# Altium PCB PCB2.PcbDoc
Units mm, origin at the board's own origin, x right, y up, seen from the top; angles counter-clockwise.
Board outline 100 x 100 mm, 2 copper layers (Top Layer, Bottom Layer); 48 components, 48 nets, 148 pads, 14 vias.
Unrouted connection lines stored in the file: 30.
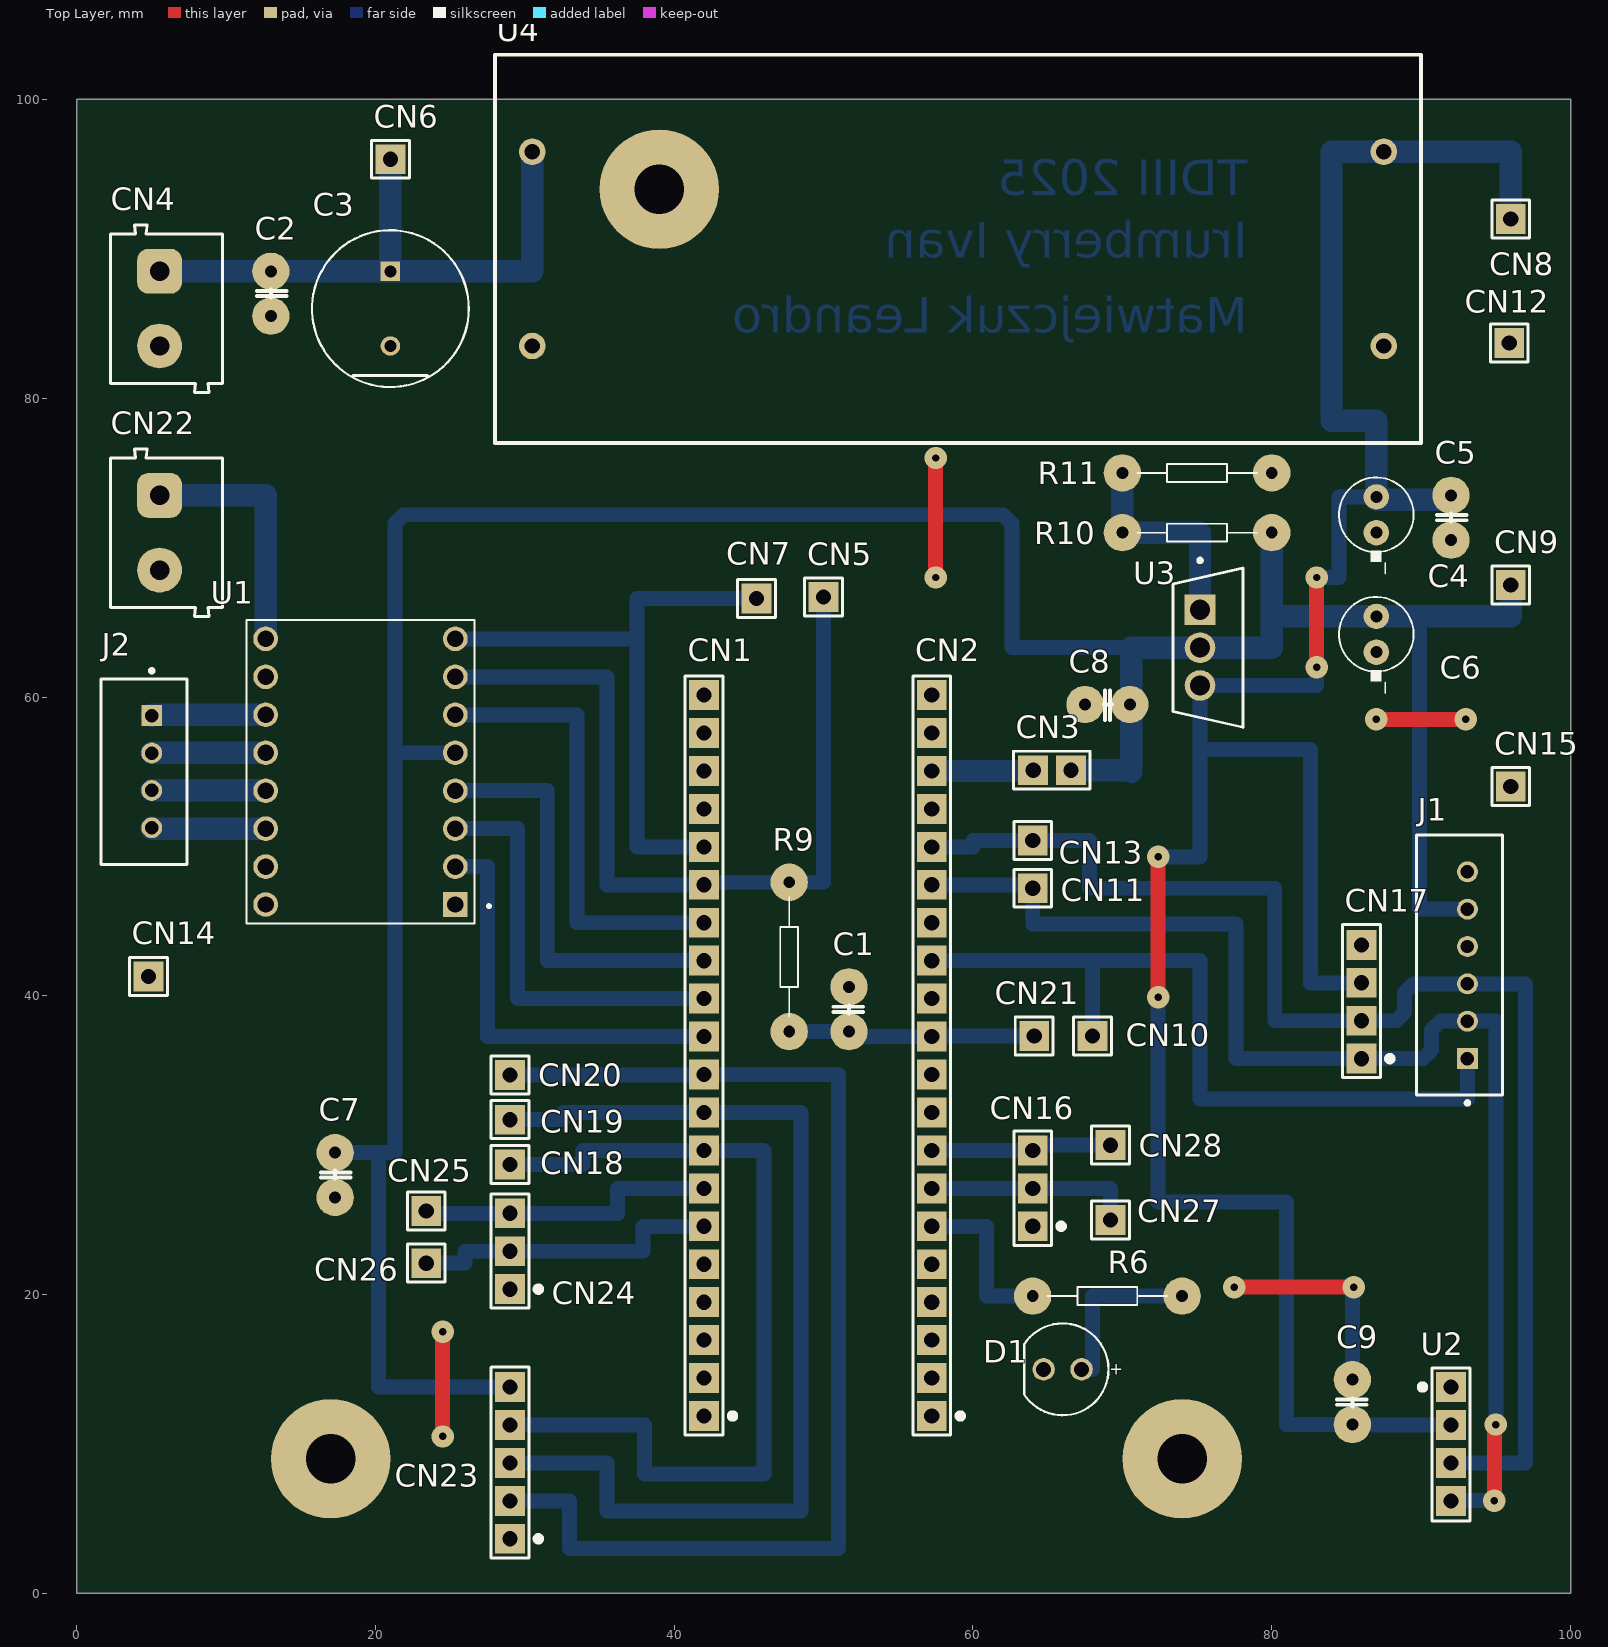
[diagram p0: Top Layer view]
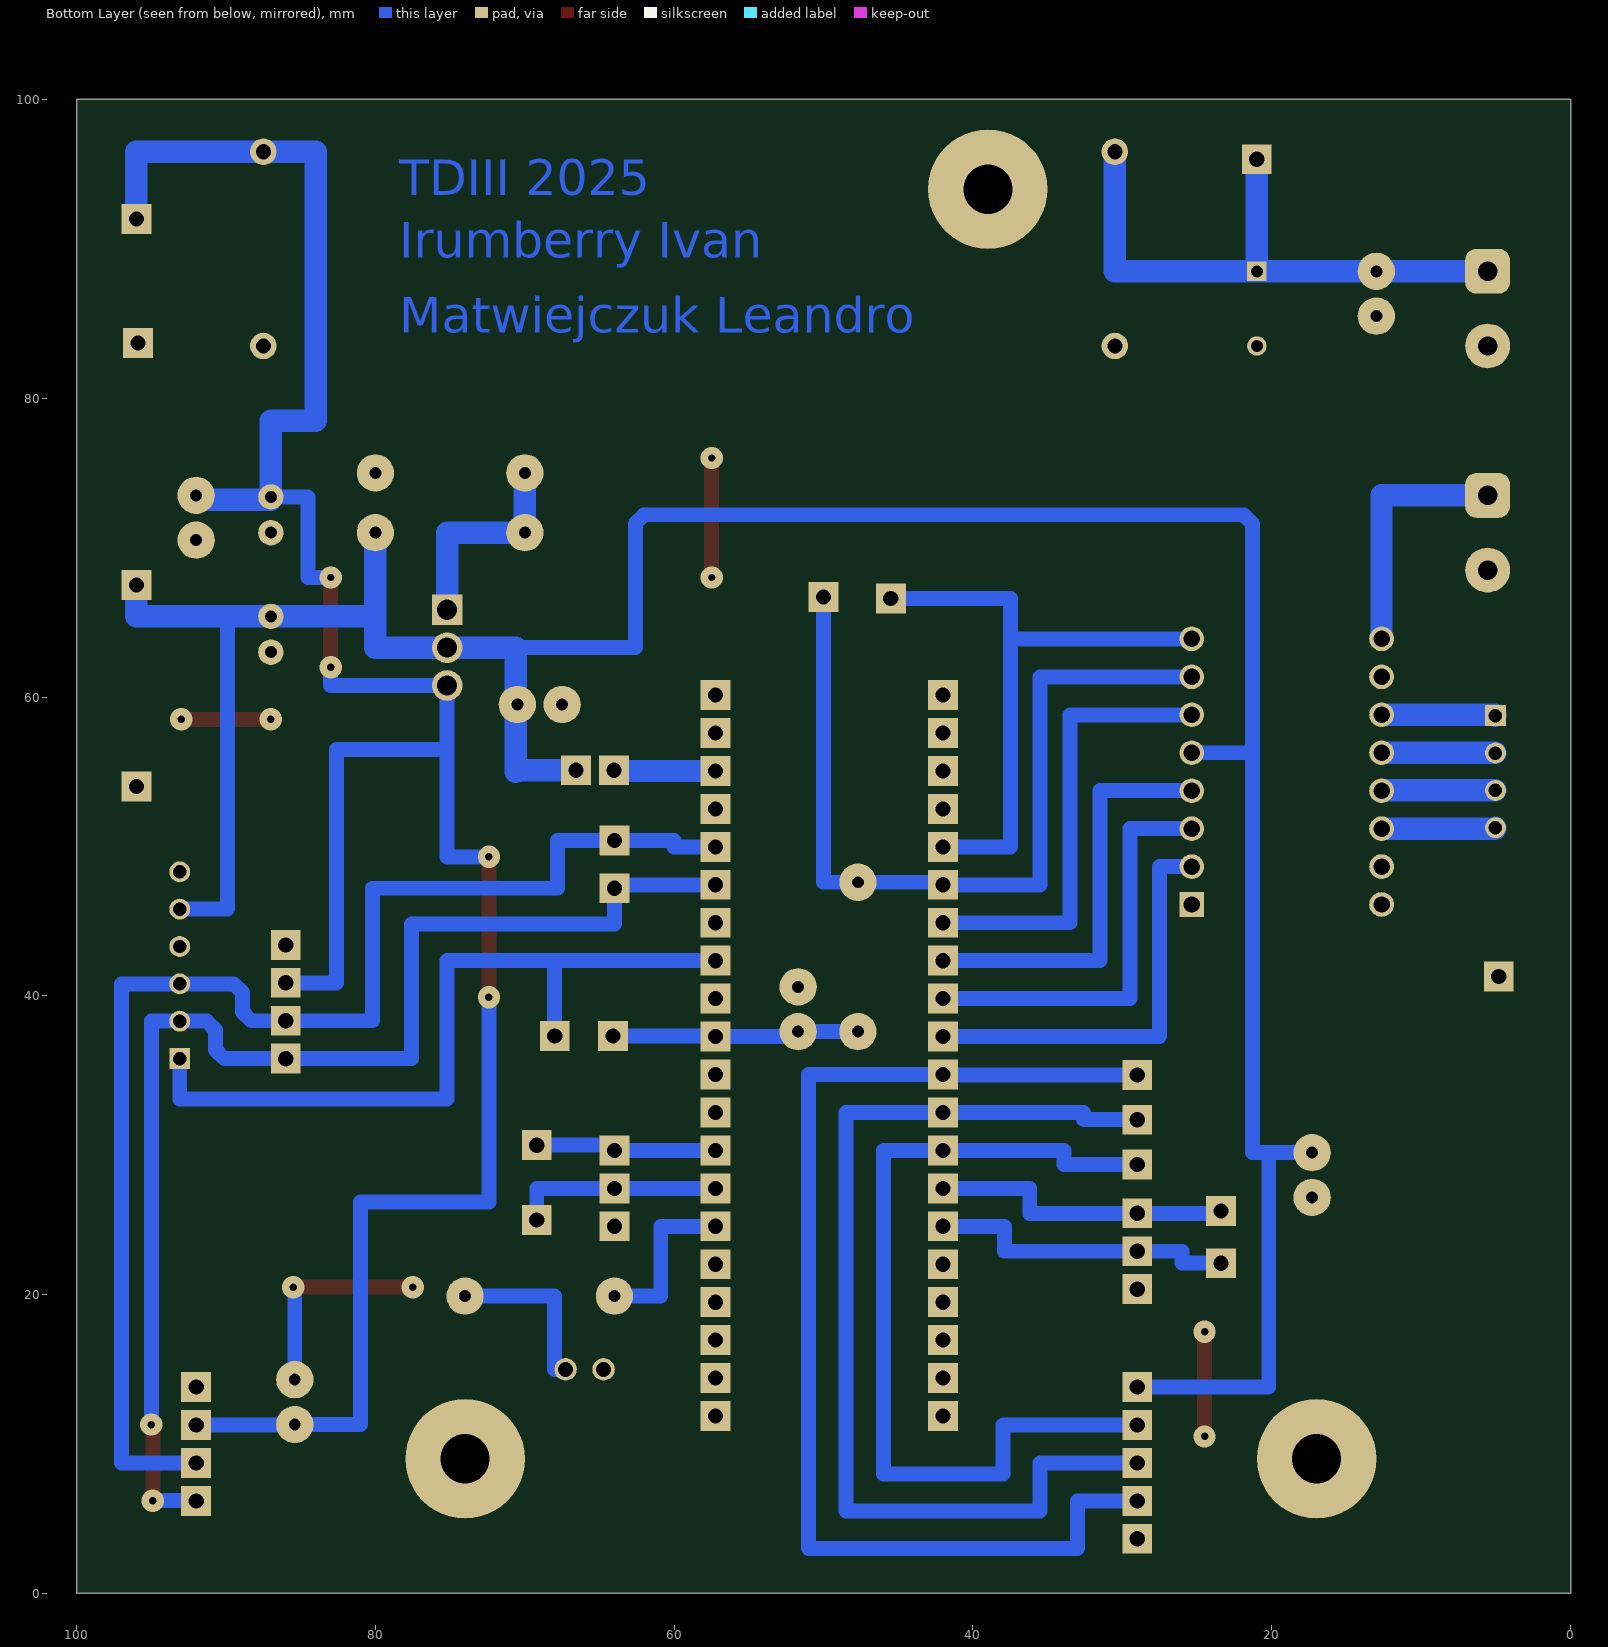
[diagram p1: Bottom Layer view, seen from below]

## Layer stack, top to bottom
Top Solder: solder mask 0.0102, Solder Resist, Dk 3.5
Top Layer: signal copper 0.0356
Dielectric 1: dielectric 0.32, FR-4, Dk 4.8
Bottom Layer: signal copper 0.0356
Bottom Solder: solder mask 0.0102, Solder Resist, Dk 3.5

## Board outline
0,0 0,100 100,100 100,0

## Design rules (kind name [scope] priority, off if disabled: settings)
Clearance Clearance_1 [OnMid vs OnMid] p1: gap=0.4 ignorepadtopadclearanceinfootprint=FALSE sourcerule=36 cellrowname=All cellrowtype=0 cellcolname=All cellcoltype=0 innerlayers=TRUE
Clearance Clearance_2 [(ExistsOnLayer('Top Layer') Or ExistsOnLayer('Bottom Layer')) vs (ExistsOnLayer('Top Layer') Or ExistsOnLayer('Bottom Layer'))] p2: gap=0.4 ignorepadtopadclearanceinfootprint=FALSE sourcerule=36 cellrowname=All cellrowtype=0 cellcolname=All cellcoltype=0 outerlayers=TRUE
Clearance [All] p3: gap=0.254 ignorepadtopadclearanceinfootprint=FALSE ismatrix=TRUE
PolygonConnect [All] p1: connectstyle=Relief reliefconductorwidth=1 reliefentries=4 polygonreliefangle="90 Angle" airgapwidth=0.254
RoutingVias [All] p1: holewidth=0.5 width=1.5 viastyle="Through Hole" minholewidth=0.5 minwidth=1.5 maxholewidth=0.5 maxwidth=1.5
SolderMaskExpansion [All] p1: expansion=0.102 istentingtop=FALSE
Width [All] p1: maxlimit=1.5 minlimit=0.8 preferedwidth=1 minimp=50.000000 maximp=50.000000 favimp=50.000000
30 further rules are at their usual default settings.

## Classes and differential pairs
component class TestPoints: CN5 CN6 CN7 CN8 CN9 CN10 CN11 CN12 CN13 CN14 CN15 CN18 CN19 CN20 CN21 CN25 CN26 CN27 CN28
component class PowerStage: C2 C3 C4 C5 C6 C7 C8 C9 CN4 R10 R11 U3 U4
component class MainCircuit: C1 CN1 CN2 CN3 CN16 CN17 CN22 CN23 CN24 D1 J1 J2 R6 R9 U1 U2

## Components (designator, comment, footprint, x,y, rotation, side; value= is the part's Value field where it differs from the comment)
C1 "C" CAP_Axial_0.2mm 51.7,39.1 r90 top
C2 "0.1uF" CAP_Axial_0.2mm 13,87 r270 top
C3 "100uF" C_RAD_11MM 21,86 r90 top
C4 "100uF" C_RAD_5mm 87,72.2 r270 top
C5 "0.1uF" CAP_Axial_0.2mm 92,72 r270 top
C6 "100uF" C_RAD_5mm 87,64.2 r270 top
C7 "0.1uF" CAP_Axial_0.2mm 17.3,28 r270 top
C8 "0.1uF" CAP_Axial_0.2mm 69,59.5 r180 top
C9 "0.1uF" CAP_Axial_0.2mm 85.4,12.8 r90 top
CN1 "Header 20x1_Female" 1*20P_FEMALE 42,36 r90 top locked
CN2 "Header 20X1_Female" 1*20P_FEMALE 57.24,36 r90 top locked
CN3 "Header 2X1_Male Jumper" "JUMPER 2x1 PIN" 65.3,55.1 r180 top
CN4 "CONN_02P" TERMINAL_BLOCK_2_PIN 6,86 r270 top
CN5 "Header 1X1_Male" 1*1P_MALE 50,66.7 r0 top
CN6 "Header 1X1_Male" 1*1P_MALE 21,96 r0 top
CN7 "Header 1X1_Male" 1*1P_MALE 45.5,66.6 r0 top
CN8 "Header 1X1_Male" 1*1P_MALE 96,92 r0 top
CN9 "Header 1X1_Male" 1*1P_MALE 96,67.5 r0 top
CN10 "Header 1X1_Male" 1*1P_MALE 68,37.3 r90 top
CN11 "Header 1X1_Male" 1*1P_MALE 64,47.2 r90 top
CN12 "Header 1X1_Male" 1*1P_MALE 95.9,83.7 r90 top
CN13 "Header 1X1_Male" 1*1P_MALE 64,50.4 r90 top
CN14 "Header 1X1_Male" 1*1P_MALE 4.8,41.3 r90 top
CN15 "Header 1X1_Male" 1*1P_MALE 96,54 r90 top
CN16 "Header 3X1_Female" 1*3P_FEMALE 64,27.11 r90 top
CN17 "Header 4X1_Female" 1*4P_FEMALE 86,39.6 r90 top
CN18 "Header 1X1_Male" 1*1P_MALE 29,28.7 r90 top
CN19 "Header 1X1_Male" 1*1P_MALE 29,31.706 r90 top
CN20 "Header 1X1_Male" 1*1P_MALE 29,34.7 r90 top
CN21 "Header 1X1_Male" 1*1P_MALE 64.1,37.3 r90 top
CN22 "CONN_02P" TERMINAL_BLOCK_2_PIN 6,71 r270 top
CN23 "Header 5X1_Female" 1*5P_FEMALE 29,10 r90 top
CN24 "Header 3X1_Female" 1*3P_FEMALE 29,22.9 r90 top
CN25 "Header 1X1_Male" 1*1P_MALE 23.4,25.6 r90 top
CN26 "Header 1X1_Male" 1*1P_MALE 23.4,22.1 r90 top
CN27 "Header 1X1_Male" 1*1P_MALE 69.2,25 r90 top
CN28 "Header 1X1_Male" 1*1P_MALE 69.2,30 r90 top
D1 "RED LED" LED_DIODE_3.9mm 66,14.994 r180 top
J1 "B6B-XH-A(LF)(SN)" "JST 6 PIN CONNECTOR" 92.575,42.05 r90 top
J2 "JST 4 PIN CONNECTOR" "JST 4 PIN CONNECTOR" 4.5,55 r90 top
R6 "200" RES_AXIAL_3.2_6MM 69,19.9 r180 top
R9 "R" RES_AXIAL_3.2_6MM 47.7,42.6 r270 top
R10 "121" RES_AXIAL_3.2_6MM 75,71 r0 top
R11 "200" RES_AXIAL_3.2_6MM 75,75 r180 top
U1 "DRV8825 STEPPER MOTOR DRIVER" IC_DRV8825_MODULE 19,55 r180 top
U2 "Display LCD 1604 i2c Module" 1*4P_FEMALE 92,10 r270 top
U3 "IRU1050" IRU1050 75.74,63.309 r0 top
U4 "STEP_DOWN MODULE" STEP_DOWN_MODULE 59,90 r0 top

## Footprints (in the part's own frame and the unit in brackets; to place one, negate y for a bottom-side part, rotate by r counter-clockwise, add the part's x,y. Pads: shape width x height; smd on the part's side, far side on the other; paste and mask are expansions set on the pad)
1*1P_MALE [mm]
  rect 2x2 hole 1.016: 1(0,0)
  silkscreen extent -1.27,-1.27 1.27,1.27, body extent -1.27,-1.19 1.27,1.3, height 8.54
1*3P_FEMALE [mm]
  rect 2x2 hole 1.016: 1(-2.54,0) 2(0,0) 3(2.54,0)
  silkscreen extent -3.81,-2.1 3.84,1.27, body extent -3.81,-1.27 3.81,1.27, height 8.89
1*4P_FEMALE [mm]
  rect 2x2 hole 1.016: 1(-3.81,0) 2(-1.27,0) 3(1.27,0) 4(3.81,0)
  silkscreen extent -5.08,-2.1 5.16,1.27, body extent -5.08,-1.27 5.08,1.27, height 8.89
1*5P_FEMALE [mm]
  rect 2x2 hole 1.016: 1(-6.35,0) 2(-3.81,0) 3(-1.27,0) 4(1.27,0) 5(3.81,0)
  silkscreen extent -7.62,-2.1 5.13,1.27, body extent -7.67,-1.27 5.03,1.32, height 9.2
1*20P_FEMALE [mm]
  rect 2x2 hole 1.016: 1(-24.13,0) 2(-21.59,0) 3(-19.05,0) 4(-16.51,0) 5(-13.97,0) 6(-11.43,0) 7(-8.89,0) 8(-6.35,0) 9(-3.81,0) 10(-1.27,0) 11(1.27,0) 12(3.81,0) 13(6.35,0) 14(8.89,0) 15(11.43,0) 16(13.97,0) 17(16.51,0) 18(19.05,0) 19(21.59,0) 20(24.13,0)
  silkscreen extent -25.4,-2.1 25.4,1.27, body extent -25.65,-1.27 25.65,1.27, height 8.5
C_RAD_5mm [mm]
  round 1.7 hole 0.8: 1(-1.2,0) 2(1.2,0)
  silkscreen extent -2.5,-2.5 3.95,2.5, body extent -2.95,-2.95 3.05,3.05, height 14
C_RAD_11MM [mm]
  rect 1.3x1.3 hole 0.8 paste-2539.97 mask+0: 1(2.5,0)
  round 1.3 hole 0.8 paste-2539.97 mask+0: 2(-2.5,0)
  silkscreen extent -5.25,-5.25 5.25,5.25, body extent -5.35,-5.35 5.35,5.35, height 0.25
CAP_Axial_0.2mm [mm]
  round 2.5 hole 0.8: 1(-1.5,0) 2(1.5,0)
  silkscreen extent -0.3,-0.95 0.25,1.05, body extent -1.85,-1.25 2.85,1.25, height 8.35
IC_DRV8825_MODULE [mm]
  rect 1.65x1.65 hole 1.1: 1(-6.35,8.89)
  round 1.65 hole 1.1: 2(-6.35,6.35) 3(-6.35,3.81) 4(-6.35,1.27) 5(-6.35,-1.27) 6(-6.35,-3.81) 7(-6.35,-6.35) 8(-6.35,-8.89) 9(6.35,-8.89) 10(6.35,-6.35) 11(6.35,-3.81) 12(6.35,-1.27) 13(6.35,1.27) 14(6.35,3.81) 15(6.35,6.35) 16(6.35,8.89)
  silkscreen extent -8.7,-10.16 7.62,10.16, body extent -7.62,-10.41 7.62,10.41, height 15.04
IRU1050 [mm]
  rect 2.05x2.05 hole 1.35 paste-2539.97 mask+0: 1(-0.54,2.535)
  round 2.05 hole 1.35 paste-2539.97 mask+0: 2(-0.54,0) 3(-0.54,-2.535)
  silkscreen extent -2.35,-5.34 2.35,5.96, body extent -2.45,-5.44 2.45,5.44, height 0.25
"JST 4 PIN CONNECTOR" [mm] "JST 4 PIN CONNECTOR"
  rect 1.4x1.4 hole 0.9 paste-2539.97 mask+0: 1(3.75,-0.525)
  round 1.4 hole 0.9 paste-2539.97 mask+0: 2(1.25,-0.525) 3(-1.25,-0.525) 4(-3.75,-0.525)
  silkscreen extent -6.2,-2.88 6.87,2.88, body extent -6.3,-2.98 6.3,2.98, height 0.25
"JST 6 PIN CONNECTOR" [mm]
  rect 1.4x1.4 hole 0.9 paste-2539.97 mask+0: 1(-6.25,-0.525)
  round 1.4 hole 0.9 paste-2539.97 mask+0: 2(-3.75,-0.525) 3(-1.25,-0.525) 4(1.25,-0.525) 5(3.75,-0.525) 6(6.25,-0.525)
  silkscreen extent -9.35,-2.88 8.7,2.88, body extent -8.7,-2.98 8.7,2.88, height 7
"JUMPER 2x1 PIN" [mm]
  rect 2x2 hole 1.016: 1(-1.27,0) 2(1.27,0)
  silkscreen extent -2.54,-1.27 2.6,1.27, body extent -2.54,-1.19 2.54,1.3, height 8.54
LED_DIODE_3.9mm [mm] "THT Mono-color Round Color LED, 2-leads"
  round 1.5 hole 1: A(-1.27,0) K(1.27,0)
  silkscreen extent -3.07,-3.07 2.58,3.08, body extent -2.95,-2.95 2.45,2.95, height 9.2
RES_AXIAL_3.2_6MM [mm] "Resistor 1/8 W L=3.2mm W=6mm"
  round 2.5 hole 0.8: 1(-5,0) 2(5,0)
  silkscreen extent -4,-0.6 4,0.6, body extent -5.23,-1 5.22,1, height 2.5
STEP_DOWN_MODULE [mil]
  round 70 hole 40: 1(-1122.05,255.91) 2(-1122.05,-255.91) 3(1122.05,255.91) 4(1122.05,-255.91)
  silkscreen extent -1220,-512 1220,512, body extent -1172,-417 1172,378, height 793
TERMINAL_BLOCK_2_PIN [mm] "5,00mm - modular - blue - Horizontal entry with pressure clamp - 9,9 mm height - 02p"
  rrect50% 3x3 hole 1.3: 1(-2.5,-0.45)
  round 3 hole 1.3: 2(2.5,-0.45)
  silkscreen extent -5.6,-3.75 5.6,3.75, body extent -5.6,-3.75 5.6,3.75, height 9.96

## Part data
C1 C2 C5 C7 C8 C9: library part CAP_NP, "Non-Polarized Capacitor"
C3 C4 C6: library part Cap_Pol, "Polarized Capacitor"
CN1: "Header, 16-Pin, Single row,female"
CN2: library part "Header 20x1_Female", "Header, 16-Pin, Single row,female"
CN3: library part "Jumper 2 Pin", "Header, 2-Pin, Single row,male", LatestRevisionDate=17-Jul-2002, LatestRevisionNote="Re-released for DXP Platform.", Publisher="Altium Limited"
CN4 CN22: "Connector Generic 2 Vias"
CN5 CN6 CN7 CN8 CN9 CN10 CN11 CN12 CN13 CN14 CN15 CN18 CN19 CN20 CN21 CN25 CN26 CN27 CN28: "Header, 1-Pin, Single row,male", LatestRevisionDate=17-Jul-2002, LatestRevisionNote="Re-released for DXP Platform.", Publisher="Altium Limited"
CN16 CN24: "Header, 3-Pin, Single row,female", LatestRevisionDate=17-Jul-2002, LatestRevisionNote="Re-released for DXP Platform.", Publisher="Altium Limited"
CN17: "Header, 4-Pin, Single row,female", LatestRevisionDate=17-Jul-2002, LatestRevisionNote="Re-released for DXP Platform.", Publisher="Altium Limited"
CN23: "Header, 5-Pin, Single row,female", LatestRevisionDate=17-Jul-2002, LatestRevisionNote="Re-released for DXP Platform.", Publisher="Altium Limited"
D1: library part LED, "LED"
J1: library part "JST 6 PIN", "CONN HEADER VERT 6POS 2.5MM"
J2: library part "JST 4 PIN", "CONN HEADER VERT 4POS 2.5MM", Color=Natural, Contact Resistance=20mR, Current Rating=3A, Flammability Rating="UL94 V-0", Housing Color=White, Insulation Resistance=1GR, Max Operating Temperature=85°C, Max Voltage Rating (AC)=250V, Min Operating Temperature=-25°C, Package Quantity=500, Connector Type=Header, Contact Finish - Mating=TIN, Contact Material=Brass, Contact Plating=Tin, Contact Shape=Square, Contact Type="Male Pin", Depth=5.75mm, Fastening Type=Detent, Gender=Male, Housing Material=Polyamide, Insulation Color=Natural, Insulation Material=Nylon, Lead Free="Lead Free", Lead Pitch=2.5mm, Length=12.4mm, Mated Stacking Heights=9.8mm, Material=Polyamide, Max Current Rating=3A, Max Voltage Rating (DC)=250V, Mount="Through Hole", Number of Contacts=4, Number of Positions=4, Number of Rows=1, Orientation=Straight, Packaging=Bulk, Pitch=2.5mm, REACH SVHC="No SVHC", Series=XH, Termination=Solder, Voltage Rating=250V, Voltage Rating (AC)=250V, Wire/Cable Gauge=22AWG
R6 R9 R10 R11: library part RES, "Through-hole Resistor"
U1: library part "DRV8825 Module", "DRV8825 STEPPER MOTOR DRIVER ,Stepper, Bipolar 8.2 ~ 45VDC Supply 1.5A 8.2 ~ 45V Load"
U3: "5A  LOW DROPOUT POSITIVEADJUSTABLE REGULATOR"
U4: library part STEP_DOWN_MODULE

## Free pads (board coordinates)
  round 8 hole 3.3: x(17,9) x(39,94) x(74,9)

## Via types
v1: diameter 1.5, hole 0.5, Top Layer to Bottom Layer, 14 vias

## Nets (pads, with @x,y where several pads share a name; then routed paths per layer and width w, separated by ;. In a path a pad name is that pad's centre, name@x,y a point inside that pad or via, vN(x,y) a via of type N, cw(c..) or ccw(c..) an arc to the next point about the centre after c; other vN are vias at no path point)
3V3: CN2.18 CN3.2 | length 6.8
  Bottom Layer w1.5: CN2.18 64.03,55.05 CN3.2
3V3D: CN1.1
5V: CN1.3
+3V3: C6.1 C7.1 C8.1 CN3.1 CN9.1 CN23.5 J1.5 R10.2 U1.5 U3.2 | length 203.6
  Bottom Layer w1: C7.1 20.2,29.5 ; U1.5 21.3,56.27 ; CN23.5 20.2,13.81 20.2,29.5 ; 70.6,63.309 62.6,63.309 62.6,71.614 62.014,72.2 21.886,72.2 21.3,71.614 21.3,56.27 ; 89.9,65.4 89.9,45.8 J1.5 ; 20.2,29.5 21.3,29.5 21.3,56.27
  Bottom Layer w1.5: CN3.1 70.6,55.1 ; 70.6,55 70.6,55.1 ; R10.2@80,71.5 R10.2 80,65.4 ; CN9.1 96,65.4 89.9,65.4 C6.1 80,65.4 ; 70.6,55.1 70.6,63.309 U3.2 80,63.309 80,65.4
+5: C4.1 C5.1 C9.1 CN8.1 CN17.3 U2.2 U3.3 U4.3 | length 170.6
  Top Layer w1: v1(72.4,39.9) v1(72.4,49.3) ; v1(83,62) v1(83,68)
  Bottom Layer w1: v1(72.4,39.9) 72.4,26.2 81,26.2 81,11.3 C9.1 85.4,11.27 U2.2 ; v1(72.4,49.3) 75.2,49.3 75.2,56.5 ; v1(83,62) 83,60.774 U3.3 75.2,56.5 ; v1(83,68) 84.5,68 84.5,73.4 C4.1 ; CN17.3 82.6,40.87 82.6,56.5 75.2,56.5
  Bottom Layer w1.5: C5.1@92,73.2 87,73.2 C4.1 87,78.5 84,78.5 84,96.5 U4.3 96,96.5 CN8.1
+12: C2.1 C3.1 CN4.1 CN6.1 U4.1 | length 41
  Bottom Layer w1.5: CN4.1@5.05,88.5 C2.1 C3.1 ; CN6.1 C3.1 ; U4.1 30.5,88.5 C3.1
GND: C1.2 C2.2 C3.2 C4.2 C5.2 C6.2 C7.2 C8.2 C9.2 CN1.2 CN2.19 CN4.2 CN12.1 CN14.1 CN15.1 CN16.1 CN17.4 CN22.2 CN23.1 CN24.1 D1.K J1.6 R11.1 U1.10 U1.16 U2.1 U4.2 U4.4 | length 35.3
  Top Layer w1: v1(24.5,10.5) v1(24.5,17.5) ; v1(57.5,68) v1(57.5,76) ; v1(77.5,20.5) v1(85.5,20.5) ; v1(87,58.5) v1(93,58.5)
  Bottom Layer w1: C9.2 85.4,20.5 v1(85.5,20.5)
I2C1_SCL: CN1.7 CN24.3 CN25.1 | length 20.4
  Bottom Layer w1: CN25.1 23.4,25.44 CN24.3 36.2,25.44 36.2,27.11 CN1.7
I2C1_SDA: CN1.6 CN24.2 CN26.1 | length 21.1
  Bottom Layer w1: CN26.1 26,22.1 26,22.9 CN24.2 37.9,22.9 37.9,24.57 CN1.6
I2C2_ENCO_DIR: CN2.13 CN10.1 J1.1 | length 52.9
  Bottom Layer w1: CN2.13 68,42.35 ; CN10.1 68,42.35 ; J1.1 93.1,33.1 75.2,33.1 75.2,42.35 68,42.35
I2C2_SCL: CN2.15 CN11.1 CN17.1 J1.2 U2.4 | length 86.3
  Top Layer w1: v1(94.9,6.2) v1@94.9,11.3
  Bottom Layer w1: CN2.15 64,47.43 CN11.1 64,44.8 77.6,44.8 77.6,35.79 CN17.1 90.114,35.79 90.7,36.376 90.7,37.714 91.286,38.3 J1.2 95,38.3 v1(95,11.3) v1@94.9,11.3 ; U2.4 92,6.2 v1(94.9,6.2)
I2C2_SDA: CN2.16 CN13.1 CN17.2 J1.3 U2.3 | length 91.1
  Bottom Layer w1: CN2.16 60,49.97 60,50.4 CN13.1 67.8,50.4 67.8,47.2 80.2,47.2 80.2,38.33 88.314,38.33 88.9,38.916 88.9,40.214 89.486,40.8 J1.3 97,40.8 97,8.73 U2.3
NetCN22_1: CN22.1 U1.9 | length 16.7
  Bottom Layer w1.5: CN22.1 12.65,73.5 U1.9
NetD1_A: D1.A R6.1 | length 11.6
  Bottom Layer w1: D1.A 68,14.994 68,19.9 R6.1
NetR10_1: R10.1 R11.2 U3.1 | length 13.9
  Bottom Layer w1.5: R10.1 75.2,71 U3.1 ; R10.1@70,71.5 R11.2
NRST: CN2.17
PA0: CN2.5
PA1: CN2.6 R6.2 | length 11.4
  Bottom Layer w1: CN2.6 60.9,24.57 60.9,19.9 R6.2
PA4: CN2.9
PA5: CN2.10
PA7: CN2.12
PA8: CN1.16 CN7.1 U1.8 | length 41.3
  Bottom Layer w1: U1.8 37.5,63.89 ; CN1.16 37.5,49.97 37.5,63.89 ; CN7.1 37.5,66.6 37.5,63.89
PA9: CN1.15 CN5.1 R9.1 U1.7 | length 57.8
  Bottom Layer w1: U1.7 35.5,61.35 35.5,47.43 CN1.15 42,47.6 R9.1 50,47.6 CN5.1
PA10: CN1.14 U1.6 | length 30.6
  Bottom Layer w1: U1.6 33.5,58.81 33.5,44.89 CN1.14
PA11: CN1.13 U1.4 | length 28
  Bottom Layer w1: U1.4 31.5,53.73 31.5,42.35 CN1.13
PA12: CN1.12 U1.3 | length 28
  Bottom Layer w1: U1.3 29.5,51.19 29.5,39.81 CN1.12
PA15: CN1.11 U1.2 | length 28.4
  Bottom Layer w1: U1.2 27.5,48.65 27.5,37.27 CN1.11 CN1.11@41.77,37.5
PB1: CN2.14
PB3: CN1.10 CN20.1 CN23.2 | length 78.9
  Bottom Layer w1: CN23.2 33,6.19 33,3 51,3 51,34.73 CN1.10 42,34.7 CN20.1
PB4: CN1.9 CN19.1 CN23.3 | length 69.4
  Bottom Layer w1: CN23.3 35.5,8.73 35.5,5.5 48.5,5.5 48.5,32.19 CN1.9 32.6,32.19 32.6,31.706 CN19.1
PB5: CN1.8 CN18.1 CN23.4 | length 59.9
  Bottom Layer w1: CN23.4 38,11.27 38,8 46,8 46,29.65 CN1.8 33.9,29.65 33.9,28.7 CN18.1
PB8: CN1.5
PB9: CN1.4
PB12: CN1.20
PB13: CN1.19
PB14: CN1.18
PB15: CN1.17
PC13: CN2.2
PC14: CN2.3
PC15: CN2.4
PWM_ADC6: C1.1 CN2.11 CN21.1 R9.2 | length 16.8
  Bottom Layer w1: R9.2 C1.1 51.7,37.27 CN2.11 57.24,37.3 CN21.1
STEP_A1: J2.3 U1.13 | length 7.6
  Bottom Layer w1.5: J2.3 U1.13@12.65,53.75
STEP_A2: J2.4 U1.14 | length 7.7
  Bottom Layer w1.5: J2.4 5.025,51.19 U1.14
STEP_B1: J2.2 U1.12 | length 7.6
  Bottom Layer w1.5: J2.2 5.025,56.27 U1.12
STEP_B2: J2.1 U1.11 | length 7.7
  Bottom Layer w1: U1.11@12.65,58.75 U1.11
  Bottom Layer w1.5: J2.1 5.025,58.81 U1.11
UART2_RX: CN2.8 CN16.3 CN28.1 | length 12.3
  Bottom Layer w1: CN2.8 CN16.3 64,30 CN28.1
UART2_TX: CN2.7 CN16.2 CN27.1 | length 14.1
  Bottom Layer w1: CN2.7 CN16.2 69.2,27.11 CN27.1
VBAT: CN2.1
pads on no net: CN2.20 J1.4 U1.1 U1.15

## Other copper
Bottom Layer:
  pour cut-out: 39,11.5 40.5,11.5 40.5,13.5 39,13.5
  pour cut-out: 24.29,62.915 24.29,62.585 22.21,62.585 22.21,65.085 24.71,65.085
  pour cut-out: 76.728,71.304 78.5,71.304 78.5,72.592 76,72.592 76,72.5
  pour cut-out: 75,32 75,32.5 73.5,32.5 73.5,32
  pour cut-out: 60.9,18.589 59,18.589 59,20.5 61,20.5 61,21
  pour cut-out: 43.5,13.5 45,13.5 45,15.5 43.5,15.5
  pour cut-out: 39,9 45,9 45,13 39,13
  pour cut-out: 33,83 81,83 81,98 33,98
  text "TDIII 2025" at 78.4,93.6 h2.4
  text "Irumberry Ivan" at 78.4,89.4 h2.4
  text "Matwiejczuk Leandro" at 78.4,84.4 h2.4

## Silkscreen, mask and mechanical layers (free items; w line width, h text height)
Board:
  the board outline again, w1

## Dimensions
0,100 to 100,100 on Mechanical 3
100,100 to 100,0 on Mechanical 3

## Text inside footprints (layer, text, board x,y; h text height)
D1: Top Overlay "+" at 70.05,15.324 h0.8 r180